# EAGLE board CT_schematic (EAGLE 7.6.0)

Size 100 x 80 mm. Coordinates in mm from the lower left corner, seen from the top.
Outline: 0,0 100,0 100,80 0,80 0,0
Copper layers (1*16): Top 0.035mm / dielectric 1.5mm / Bottom 0.035mm
Design rules "default": minimum track width 10mil, minimum drill 24mil, track to track 8mil, track to pad 8mil, pad to pad 8mil, via to via 8mil, smd to smd 8mil, copper to edge 40mil, drill to drill 8mil, minimum pad ring 10mil, minimum via ring 8mil, stop-mask expansion 4mil, vias tented up to drill 0mil, thermal gap 10mil

## Footprints (pad centres in the part's own frame; a part is rotated, then mirrored left to right if it is on the bottom)
C0603 = smd 0.8 x 0.8: 1 -0.762,0; 2 0.762,0
C0402 = smd 0.5 x 0.5: 1 -0.508,0; 2 0.508,0
C0805 = smd 1.2 x 1.3: 1 -1.016,0; 2 1.016,0
C1210 = smd 1.2 x 2.5: 1 -1.524,0; 2 1.524,0
EXV-9H = smd 3.505 x 1.676: 1 -2.857,0; 2 2.857,0
L0603 = smd 0.8 x 0.8: 1 -0.762,0; 2 0.762,0
L1210 = smd 1.2 x 2.5: 1 -1.524,0; 2 1.524,0
PJ-037B_PACKAGE = drill 3.7 square: 1 12,0 | drill 3.2 square: 2 6,0
R0603 = smd 0.8 x 0.8: 1 -0.762,0; 2 0.762,0
UFQFPN20 = smd 0.35 x 0.3: 1 0.1,0; 5 0.1,2; 11 -2.7,2; 15 -2.7,0 | smd 0.7 x 0.3: 2 0,0.5; 3 0,1; 4 0,1.5; 12 -2.6,1.5; 13 -2.6,1; 14 -2.6,0.5 | smd 0.3 x 0.35: 6 -0.3,2.4; 10 -2.3,2.4; 16 -2.3,-0.4; 20 -0.3,-0.45 | smd 0.3 x 0.7: 7 -0.8,2.3; 17 -1.8,-0.3; 18 -1.3,-0.3; 19 -0.8,-0.3 | smd 0.3 x 0.8: 8 -1.3,2.3; 9 -1.8,2.3
SAMTEC_FTSH-105-01-L-DV-K = smd 0.762 x 2.794: 1 -2.54,-2.032; 2 -2.54,2.032; 3 -1.27,-2.032; 4 -1.27,2.032; 5 0,-2.032; 6 0,2.032; 7 1.27,-2.032; 8 1.27,2.032; 9 2.54,-2.032; 10 2.54,2.032
SSOP-20 = smd 1.651 x 0.432: 1 -3.48,2.925; 2 -3.48,2.275; 3 -3.48,1.625; 4 -3.48,0.975; 5 -3.48,0.325; 6 -3.48,-0.325; 7 -3.48,-0.975; 8 -3.48,-1.625; 9 -3.48,-2.275; 10 -3.48,-2.925; 11 3.48,-2.925; 12 3.48,-2.275; 13 3.48,-1.625; 14 3.48,-0.975; 15 3.48,-0.325; 16 3.48,0.325; 17 3.48,0.975; 18 3.48,1.625; 19 3.48,2.275; 20 3.48,2.925
182-009-MALE = drill 1.194 pad 1.524 octagon: 1 -5.537,10.923; 2 -2.769,10.923; 3 0,10.923; 4 2.769,10.923; 5 5.537,10.923; 6 -4.153,8.08; 7 -1.384,8.08; 8 1.384,8.08; 9 4.153,8.08 | hole 3.048: -12.446,9.501; 12.446,9.501
DFN-6 = smd 0.805 x 0.3: 1 -0.952,0.5; 2 -0.952,0; 3 -0.952,-0.5; 4 0.952,-0.5; 5 0.952,0; 6 0.952,0.5 | smd 0.61 x 1.42: 7 0,0
ASEK = smd 1.4 x 1: 1 -1.1,-0.8; 2 1.1,-0.8; 3 1.1,0.8; 4 -1.1,0.8
ASFL1 = smd 1.7 x 1.5: 1 -1.27,-1.1; 2 1.27,-1.1; 3 1.27,1.1; 4 -1.27,1.1
SOIC-8_EP = smd 1.6 x 0.533: 1 -2.921,1.905; 2 -2.921,0.635; 3 -2.921,-0.635; 4 -2.921,-1.905; 5 2.921,-1.905; 6 2.921,-0.635; 7 2.921,0.635; 8 2.921,1.905 | smd 2.54 x 3.302: EPAD 0,0 | drill 0.406 pad 0.406: P$1 -0.508,0.635; P$2 0.381,0.635; P$3 -0.508,-0.635; P$4 0.381,-0.635
SON-6 = smd 0.55 x 0.3: 1 -0.355,0.5 | smd 0.52 x 0.3: 2 -0.37,0; 3 -0.37,-0.5; 4 0.37,-0.5; 5 0.37,0; 6 0.37,0.5
SW_4-1437565-2 = smd 1.4 x 2.1: 1 -2.23,4.55; 2 -2.23,-4.55; 3 2.23,4.55; 4 2.23,-4.55
LGM67K-G1J2-24-Z = smd 0.8 x 1.4: A -2,0; C 0,0
NC7SZ125M5X = smd 1.3 x 0.7: 1 -1.3,0.95; 2 -1.3,0; 3 -1.3,-0.95; 4 1.3,-0.95; 5 1.3,0.95

## Placement (x,y rotation side)
C1  1e-07  [C0603]  -38.1,72.39 0 top  (outside the outline)
C2  1e-07  [C0603]  -41.91,72.39 0 top  (outside the outline)
C3  1e-07  [C0603]  -45.72,72.39 0 top  (outside the outline)
C4  1e-07  [C0603]  -49.53,72.39 0 top  (outside the outline)
C5  4.7e-06  [C0603]  -34.29,72.39 0 top  (outside the outline)
C6  1e-08  [C0603]  -53.34,72.39 0 top  (outside the outline)
C7  1e-06  [C0603]  -57.15,72.39 0 top  (outside the outline)
C8  1e-07  [C0402]  -49.53,77.47 0 top  (outside the outline)
C9  1e-06  [C0603]  -60.96,72.39 0 top  (outside the outline)
C10  1e-06  [C0603]  -64.77,72.39 0 top  (outside the outline)
C11  1e-06  [C0603]  -68.58,72.39 0 top  (outside the outline)
C12  4.7e-06  [C0805]  -21.59,67.31 0 top  (outside the outline)
C13  1e-07  [C0402]  -53.34,77.47 0 top  (outside the outline)
C14  1e-08  [C0402]  -57.15,77.47 0 top  (outside the outline)
C15  1e-08  [C0402]  -60.96,77.47 0 top  (outside the outline)
C16  1e-05  [C1210]  -38.1,60.96 0 top  (outside the outline)
C17  1e-05  [C1210]  -44.45,60.96 0 top  (outside the outline)
C18  1e-05  [C1210]  -50.8,60.96 0 top  (outside the outline)
C19  1e-05  [C1210]  -57.15,60.96 0 top  (outside the outline)
C20  1e-07  [C0402]  -64.77,77.47 0 top  (outside the outline)
C21  0.0001  [EXV-9H]  -55.88,53.34 0 top  (outside the outline)
C22  0.0001  [EXV-9H]  -67.31,53.34 0 top  (outside the outline)
C23  1e-08  [C0402]  -68.58,77.47 0 top  (outside the outline)
C24  1e-08  [C0402]  -72.39,77.47 0 top  (outside the outline)
F1  240.0  [L0603]  -15.24,77.47 0 top  (outside the outline)
I1  1.5e-05  [L1210]  -63.5,60.96 0 top  (outside the outline)
J1  PJ-037B  [PJ-037B_PACKAGE]  -57.15,29.21 0 top  (outside the outline)
R1  10000.0  [R0603]  -60.96,67.31 0 top  (outside the outline)
R2  1000.0  [R0603]  -19.05,77.47 0 top  (outside the outline)
R3  1600.5  [R0603]  -22.86,77.47 0 top  (outside the outline)
R4  4700.0  [R0603]  -26.67,77.47 0 top  (outside the outline)
R5  2200.0  [R0603]  -30.48,77.47 0 top  (outside the outline)
R6  2200.0  [R0603]  -34.29,77.47 0 top  (outside the outline)
R7  10000.0  [R0603]  -66.04,67.31 0 top  (outside the outline)
R8  10000.0  [R0603]  -71.12,67.31 0 top  (outside the outline)
R9  10000.0  [R0603]  -15.24,72.39 0 top  (outside the outline)
R10  10000.0  [R0603]  -20.32,72.39 0 top  (outside the outline)
R11  5.0  [R0603]  -38.1,77.47 0 top  (outside the outline)
R12  100000.0  [R0603]  -35.56,67.31 0 top  (outside the outline)
R13  100000.0  [R0603]  -40.64,67.31 0 top  (outside the outline)
R14  100000.0  [R0603]  -45.72,67.31 0 top  (outside the outline)
R15  4031.5447154472  [R0603]  -30.48,67.31 0 top  (outside the outline)
R16  2200.0  [R0603]  -41.91,77.47 0 top  (outside the outline)
R17  10000.0  [R0603]  -25.4,72.39 0 top  (outside the outline)
R18  10000.0  [R0603]  -30.48,72.39 0 top  (outside the outline)
R19  9100.0  [R0603]  -45.72,77.47 0 top  (outside the outline)
R20  680000.0  [R0603]  -50.8,67.31 0 top  (outside the outline)
R21  120000.0  [R0603]  -55.88,67.31 0 top  (outside the outline)
U1  STM32L021F4U6TR  [UFQFPN20]  -25.4,52.07 0 top  (outside the outline)
U2  FTSH-105-01-L-DV-K  [SAMTEC_FTSH-105-01-L-DV-K]  -35.56,30.48 0 top  (outside the outline)
U3  MAX3218EAP+T  [SSOP-20]  -38.1,41.91 0 top  (outside the outline)
U4  182-009-113R531  [182-009-MALE]  -36.83,6.35 0 top  (outside the outline)
U5  SI7006-A20-IM  [DFN-6]  -15.24,81.28 0 top  (outside the outline)
U6  ASEK-32.768KHz-ECST  [ASEK]  -46.99,53.34 0 top  (outside the outline)
U7  ASFL1-12MHZ-NCS  [ASFL1]  -57.15,41.91 0 top  (outside the outline)
U8  MIC5234YME  [SOIC-8_EP]  -17.78,59.69 0 top  (outside the outline)
U9  TPS3895ADRYR  [SON-6]  -17.78,81.28 0 top  (outside the outline)
U10  4-1437565-2  [SW_4-1437565-2]  -27.94,43.18 0 top  (outside the outline)
U11  Q65110A2395  [LGM67K-G1J2-24-Z]  -26.67,60.96 0 top  (outside the outline)
U12  nc7sz125m5x  [NC7SZ125M5X]  -68.58,59.69 0 top  (outside the outline)
U13  nc7sz125m5x  [NC7SZ125M5X]  -15.24,66.04 0 top  (outside the outline)

## Library data of the parts
C1-C24 F1 I1 J1 R1-R21 U1-U13 = circuit_tree

## Nets
CLK_U1_1: U1.1 U6.3
CLK_U1_5: U1.5 U7.3
GND: C1.2 C2.2 C3.2 C4.2 C5.2 C6.2 C7.2 C8.2 C9.2 C10.2 C11.2 C13.2 C14.2 C15.2 C16.2 C17.2 C18.2 C19.2 C20.2 C21.2 C22.2 C23.2 C24.2 J1.2 R2.2 R7.2 R11.2 R16.2 R19.2 R21.2 U1.12 U2.3 U2.5 U3.5 U3.17 U3.20 U4.5 U5.2 U5.7 U6.2 U7.2 U8.7 U8.EPAD U9.2 U11.C U12.2 U12.3 U13.1 U13.3
NET_U1_3: R4.1 U1.3 U13.4
NET_U1_4: C6.1 C7.1 F1.1 U1.4
NET_U1_7: R5.1 U1.7 U5.6
NET_U1_15: R6.1 U1.15 U5.1
NET_U1_18: R3.1 U1.18 U11.A
NET_U1_20: R1.1 R7.1 U1.20 U10.3 U10.4
NET_U2_9: R11.1 U2.9
NET_U3_1: I1.1 U3.1
NET_U3_2: R12.1 U3.2
NET_U3_3: R13.1 U3.3
NET_U3_4: R14.1 U3.4
NET_U3_15: C11.1 U3.15
NET_U3_16: C12.2 U3.16
NET_U3_18: C12.1 U3.18
NET_U3_19: C10.1 U3.19
NET_U4_2: U3.12 U4.2
NET_U4_3: U3.14 U4.3
NET_U4_7: U3.11 U4.7
NET_U4_8: U3.13 U4.8
NET_U8_4: R15.2 R16.1 U8.4
NET_U9_1: R18.1 R19.1 U9.1
NET_U9_3: R20.2 R21.1 U9.3
NET_U9_4: R17.1 U9.4 U12.4 U13.2
NET_U10_1: R2.1 U10.1 U10.2
PROC_LPUART1_CTS: U1.9 U3.8
PROC_LPUART1_RTS: U1.11 U3.10
PROC_LPUART1_RX: U1.19 U3.9
PROC_LPUART1_TX: U1.6 U3.7
PROC_SYS_SWCLK: R9.1 U1.17 U2.4
PROC_SYS_SWDIO: R10.1 U1.16 U2.2
RST_OUT_U2_JTAG_RST_B: R8.1 U2.10 U12.1
VCC_S1_6V9: C16.1 C17.1 C21.1 C22.1 J1.1 U8.5 U8.8
VCC_TIER1_3V3: C1.1 C2.1 C3.1 C4.1 C5.1 C8.1 C9.1 C13.1 C14.1 C15.1 C18.1 C19.1 C20.1 C23.1 C24.1 F1.2 I1.2 R1.2 R3.2 R4.2 R5.2 R6.2 R8.2 R9.2 R10.2 R12.2 R13.2 R14.2 R15.1 R17.2 R18.2 R20.1 U1.13 U2.1 U3.6 U5.5 U6.4 U7.4 U8.1 U9.6 U12.5 U13.5

## Tracks (layer width: path | path; a pad name or v marks a point on that pad's centre or on a via)
CLK_U1_1  (1 unrouted)
CLK_U1_5  (1 unrouted)
GND  (48 unrouted)
NET_U1_3  (2 unrouted)
NET_U1_4  (3 unrouted)
NET_U1_7  (2 unrouted)
NET_U1_15  (2 unrouted)
NET_U1_18  (2 unrouted)
NET_U1_20  (4 unrouted)
NET_U2_9  (1 unrouted)
NET_U3_1  (1 unrouted)
NET_U3_2  (1 unrouted)
NET_U3_3  (1 unrouted)
NET_U3_4  (1 unrouted)
NET_U3_15  (1 unrouted)
NET_U3_16  (1 unrouted)
NET_U3_18  (1 unrouted)
NET_U3_19  (1 unrouted)
NET_U4_2  (1 unrouted)
NET_U4_3  (1 unrouted)
NET_U4_7  (1 unrouted)
NET_U4_8  (1 unrouted)
NET_U8_4  (2 unrouted)
NET_U9_1  (2 unrouted)
NET_U9_3  (2 unrouted)
NET_U9_4  (3 unrouted)
NET_U10_1  (2 unrouted)
PROC_LPUART1_CTS  (1 unrouted)
PROC_LPUART1_RTS  (1 unrouted)
PROC_LPUART1_RX  (1 unrouted)
PROC_LPUART1_TX  (1 unrouted)
PROC_SYS_SWCLK  (2 unrouted)
PROC_SYS_SWDIO  (2 unrouted)
RST_OUT_U2_JTAG_RST_B  (2 unrouted)
VCC_S1_6V9  (6 unrouted)
VCC_TIER1_3V3  (41 unrouted)